# Altium PCB INT_REVA.PcbDoc
Units mm, origin at the board's own origin, x right, y up, seen from the top; angles counter-clockwise.
Board outline 95.88 x 101.01 mm, 4 copper layers (Top Layer, Layer 1, Layer 2, Bottom Layer), stack 1.586 mm thick; 2 components, 54 nets, 158 pads, 61 vias.
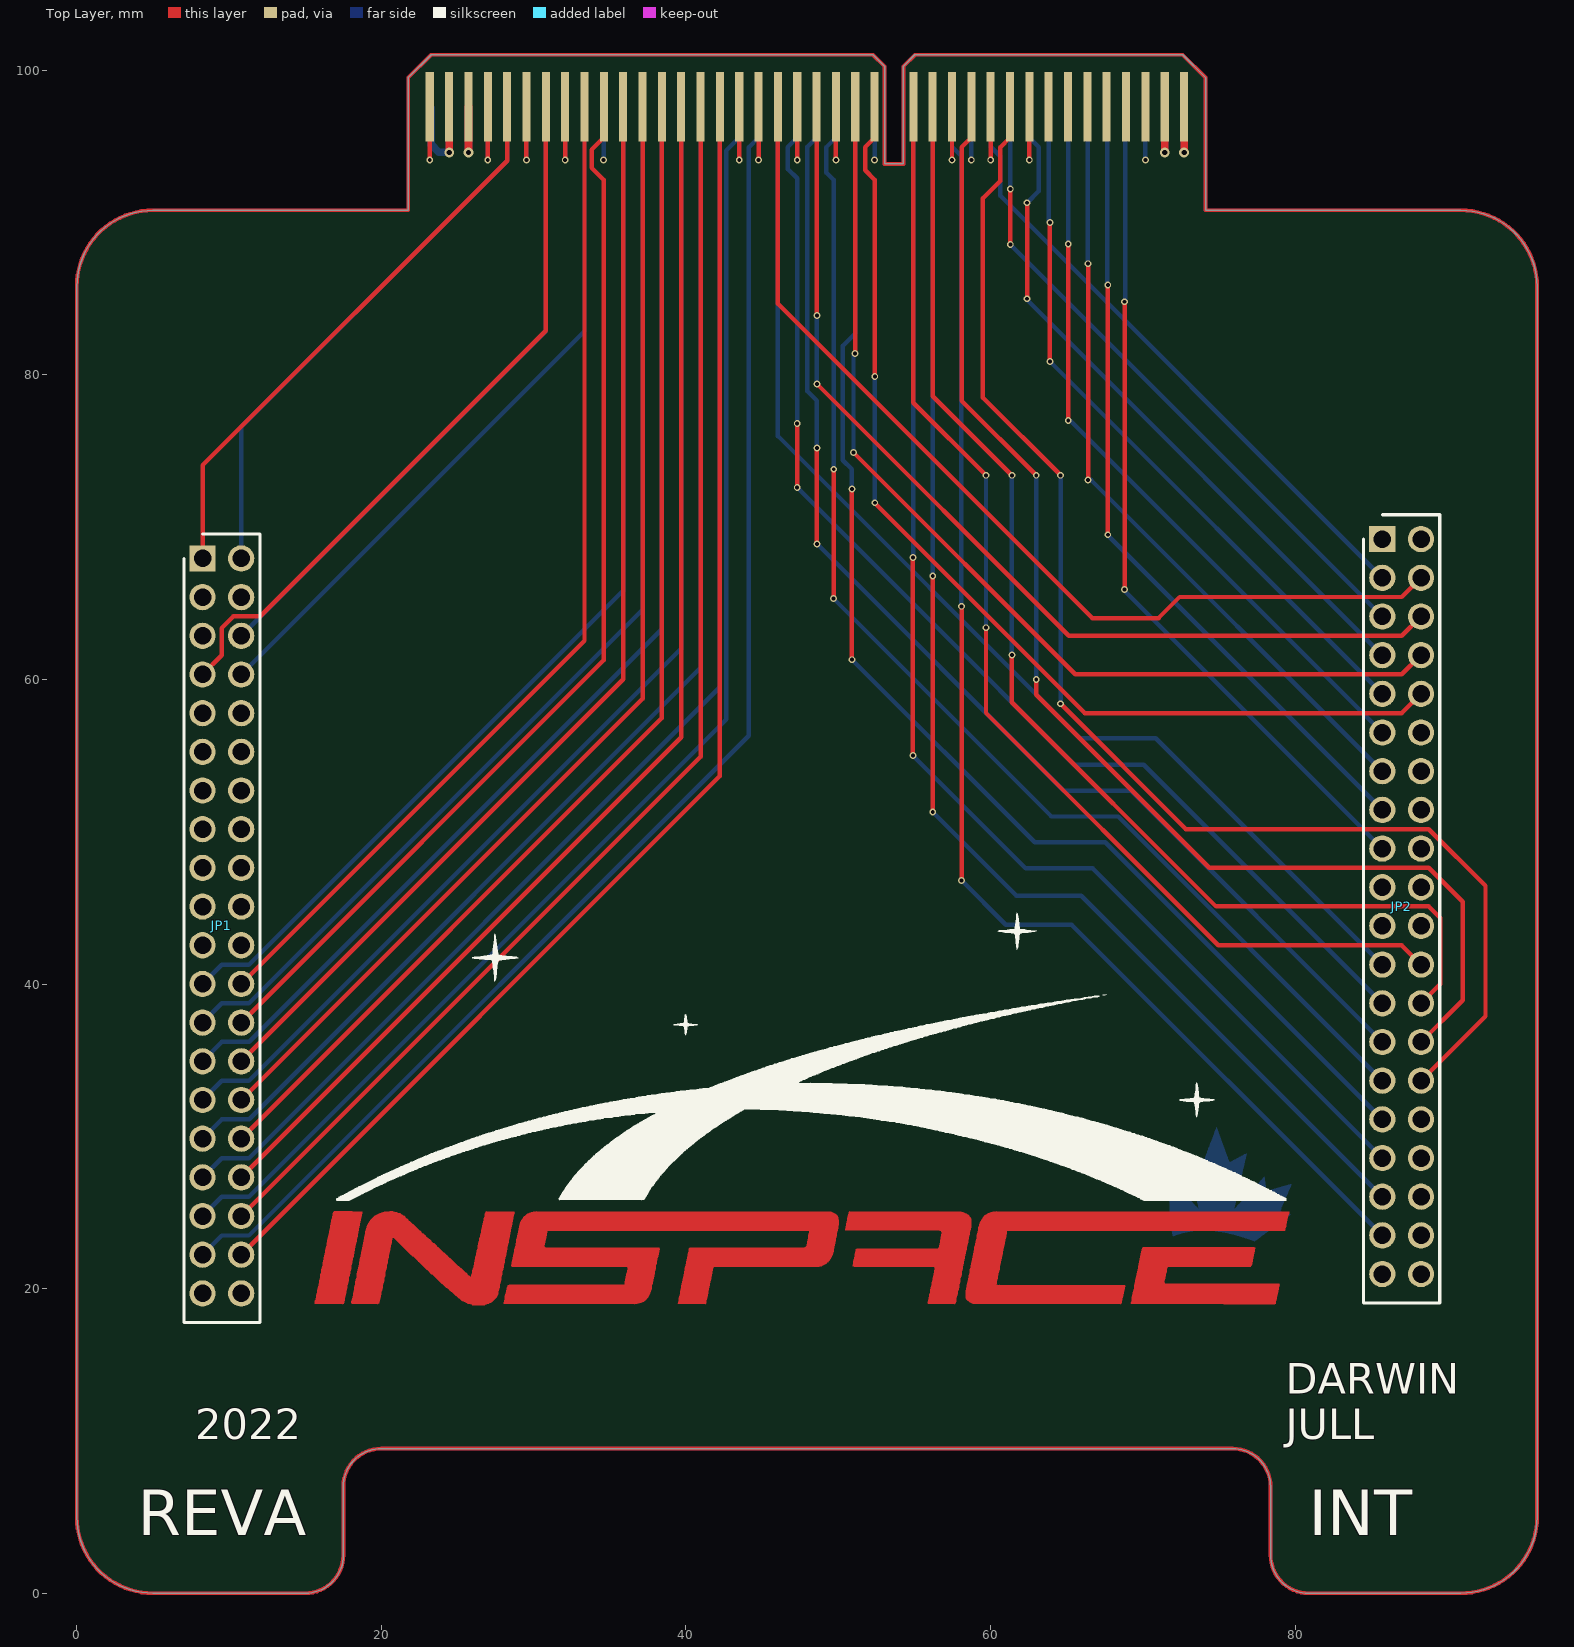
[diagram p0: Top Layer view]
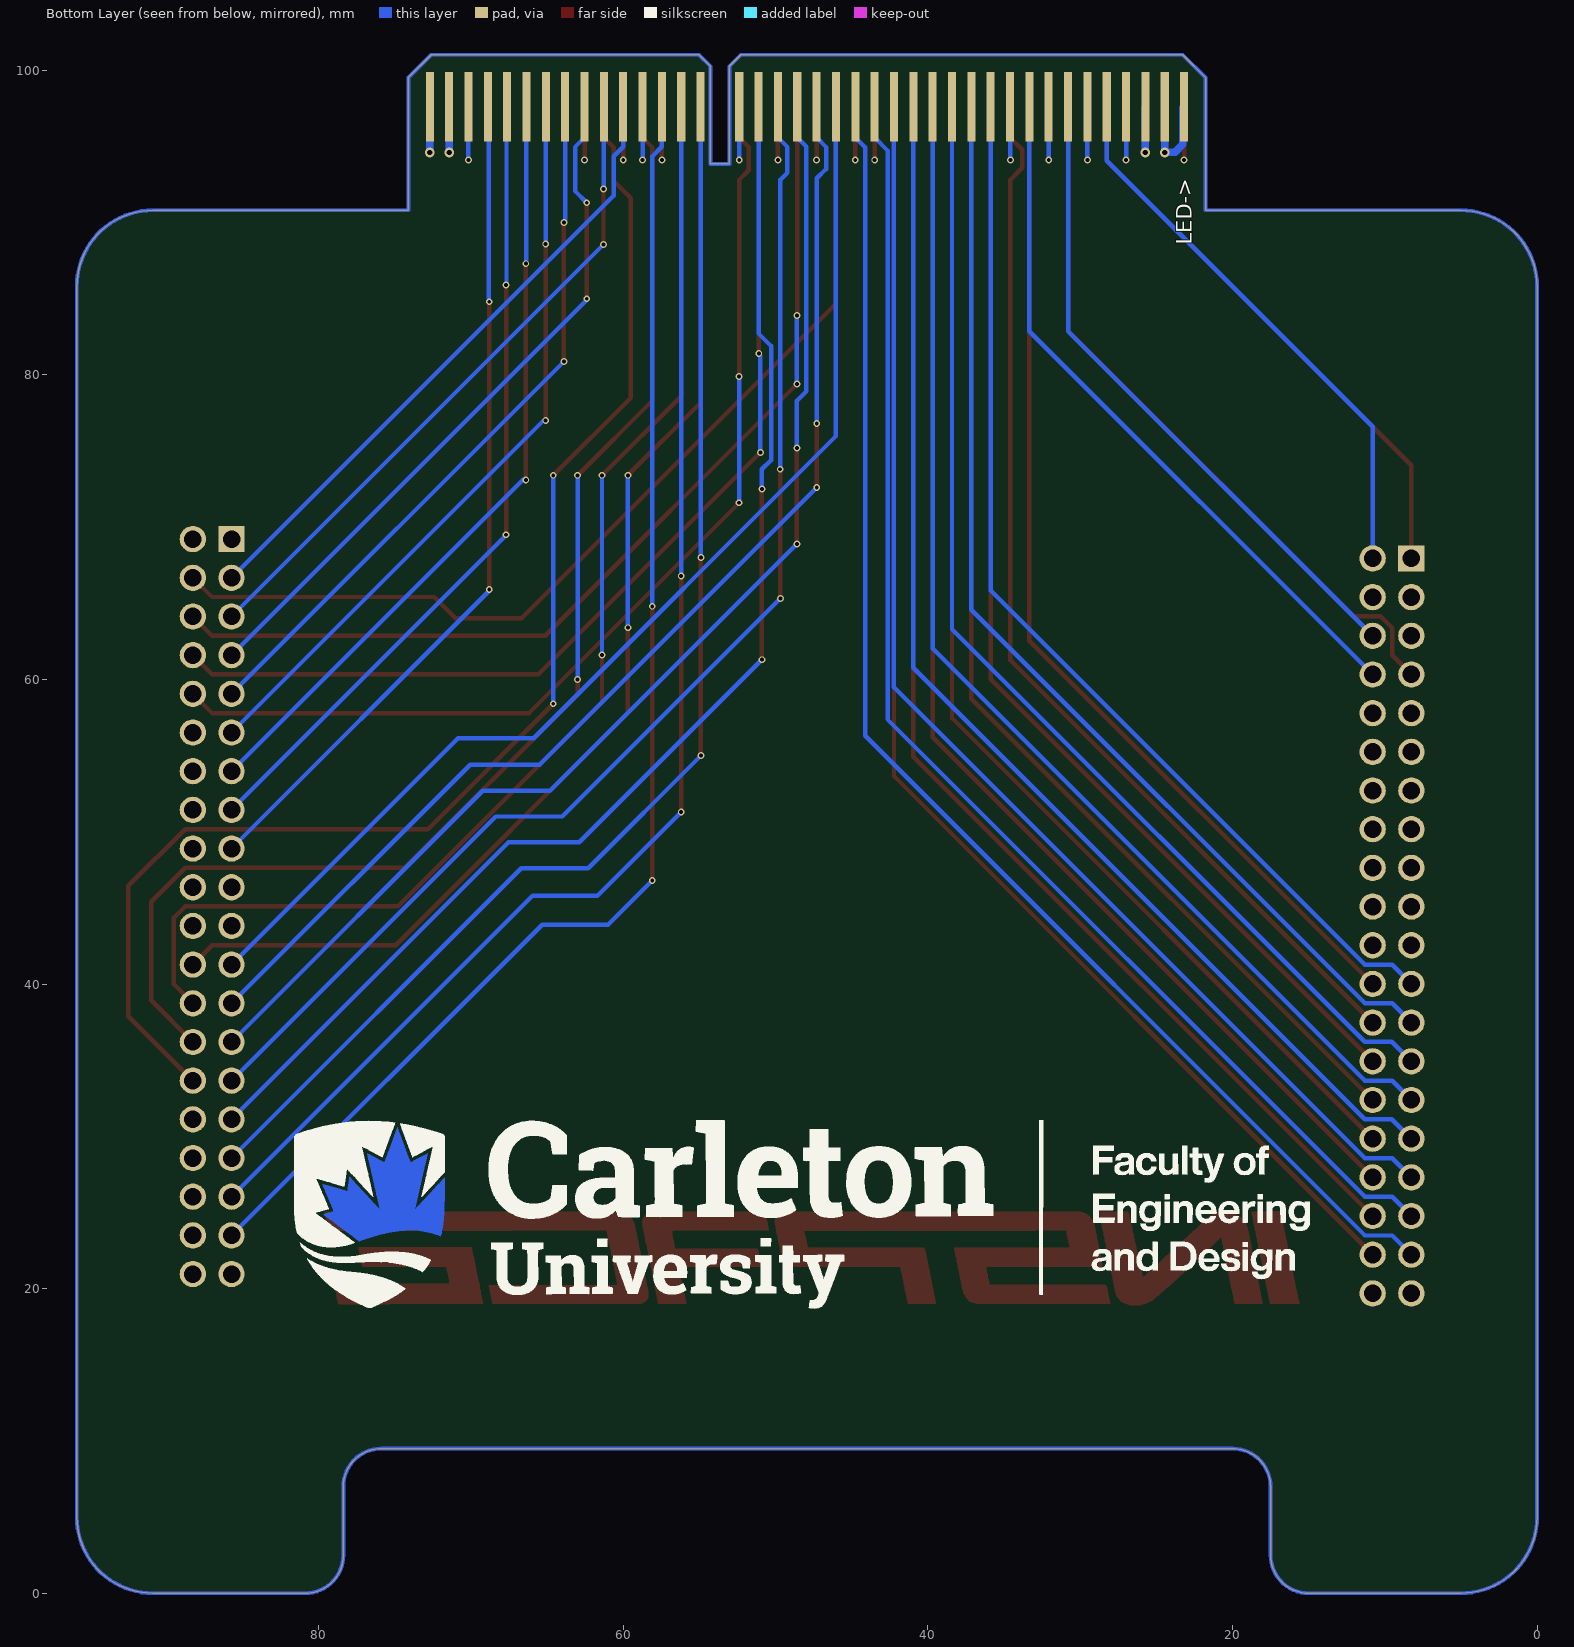
[diagram p1: Bottom Layer view, seen from below]
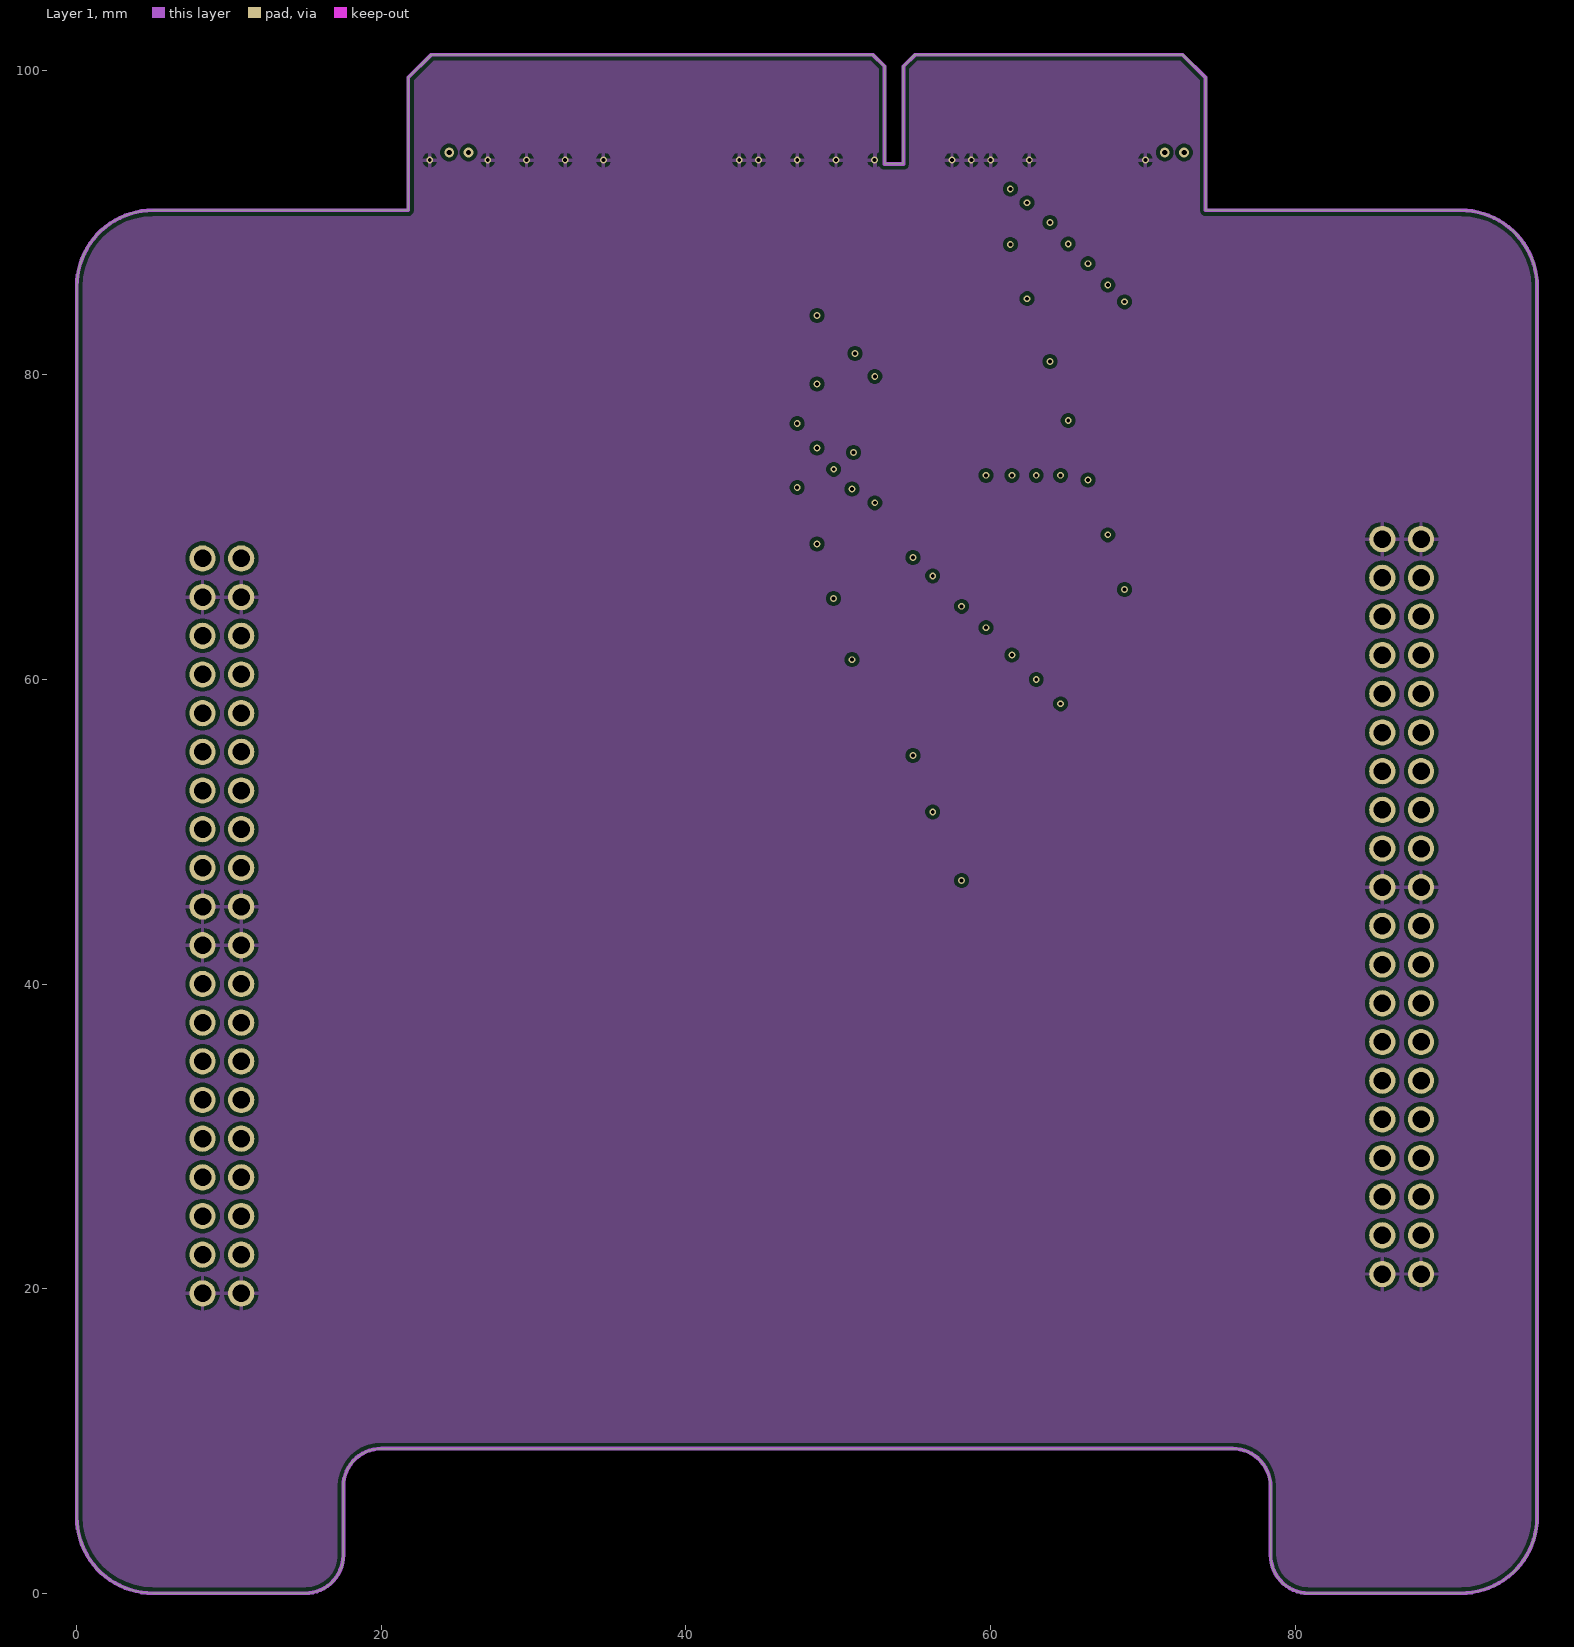
[diagram p2: Layer 1]
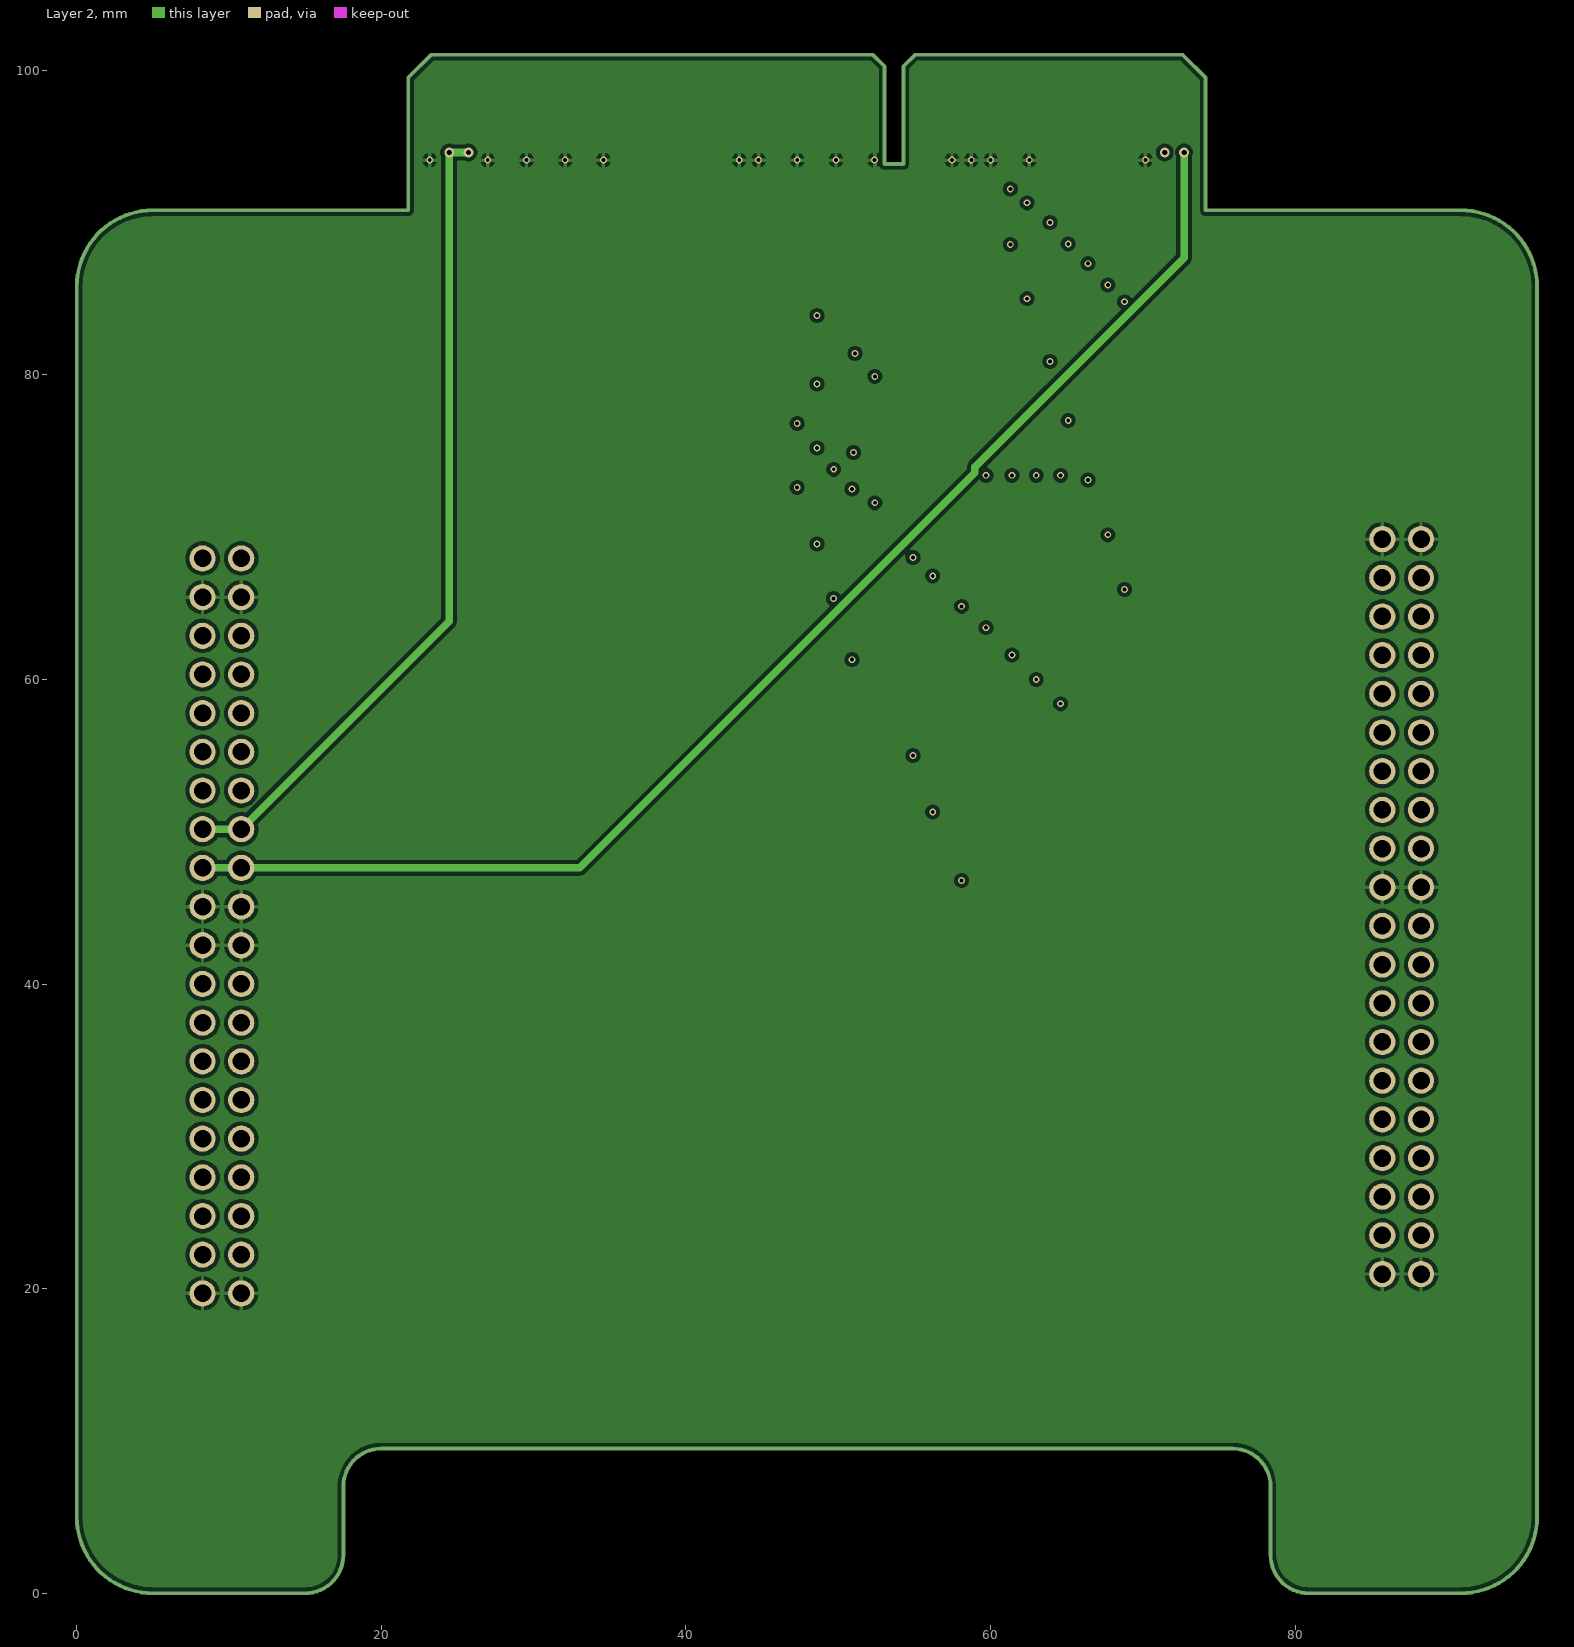
[diagram p3: Layer 2]

## Layer stack, top to bottom
Top Solder: solder mask 0.0203, Solder Resist, Dk 3.8
Top Layer: signal copper 0.035
Dielectric 2: prepreg 0.2104, PP-006, Dk 4.6
Layer 1: signal copper 0.0152
Dielectric 1: dielectric 1.065, FR-4, Dk 4.6
Layer 2: signal copper 0.0152
Dielectric 3: prepreg 0.2104, PP-006, Dk 4.6
Bottom Layer: signal copper 0.035
Bottom Solder: solder mask 0.0203, Solder Resist, Dk 3.8

## Board outline
5,0 15,0 ccw(c15,2.5) 17.5,2.5 17.5,7 cw(c20,7) 20,9.5 75.885,9.5 cw(c75.885,7) 78.385,7 78.385,2.5 ccw(c80.885,2.5) 80.885,0 90.885,0 ccw(c90.885,5) 95.885,5 95.885,85.805 ccw(c90.885,85.805) 90.885,90.805 74.117,90.805 74.117,99.517 72.617,101.015 55.027,101.015 54.277,100.265 54.277,93.855 53.037,93.855 53.037,100.265 52.287,101.015 23.267,101.015 21.767,99.517 21.768,90.805 5,90.805 ccw(c5,85.805) 0,85.805 0,5 ccw(c5,5)

## Design rules (kind name [scope] priority, off if disabled: settings)
Clearance [All] p1: gap=0.254 ignorepadtopadclearanceinfootprint=TRUE except(0: Arc-Hole Track-Hole SMDPad-Hole THPad-Hole Via-Hole Fill-Hole Poly-Hole Region-Hole Text-Hole; 0.127: Arc-Arc Arc-Track Track-Track SMDPad-SMDPad THPad-THPad)
PlaneConnect [All] p1: pad.planeconnectstyle=Relief pad.reliefexpansion=0.508 pad.reliefentries=4 pad.reliefconductorwidth=0.254 pad.reliefairgap=0.254 via.planeconnectstyle=Direct via.reliefexpansion=0.508 via.reliefentries=4 via.reliefconductorwidth=0.254 via.reliefairgap=0.254
PolygonConnect [All] p1: connectstyle=Relief reliefconductorwidth=0.254 reliefentries=4 polygonreliefangle="90 Angle" airgapwidth=0.254
RoutingVias [All] p1: holewidth=0.254 width=0.445 viastyle="Through Hole" minholewidth=0.2 minwidth=0.4 maxholewidth=6.3 maxwidth=6.4
SolderMaskExpansion [All] p1: expansion=0.102 istentingtop=FALSE
Width [All] p1: maxlimit=2.5 minlimit=0.127 preferedwidth=0.293 midlayer1_minwidth=0.254 midlayer1_prefwidth=0.254 midlayer2_minwidth=0.254 midlayer2_prefwidth=0.254 minimp=50.000000 maximp=50.000000 favimp=50.000000
29 further rules are at their usual default settings.

## Components (designator, comment, footprint, x,y, rotation, side; value= is the part's Value field where it differs from the comment)
JP1 "M20-6102045" RHDR40W66P254_2X20_5146X500X1105P 8.255,67.945 r270 top locked
JP2 "M20-6102045" RHDR40W66P254_2X20_5146X500X1105P 85.725,69.215 r270 top locked

## Footprints (in the part's own frame and the unit in brackets; to place one, negate y for a bottom-side part, rotate by r counter-clockwise, add the part's x,y. Pads: shape width x height; smd on the part's side, far side on the other; paste and mask are expansions set on the pad)
RHDR40W66P254_2X20_5146X500X1105P [mm]
  rect 1.725x1.725 / inner round 1.725 / far side rect 1.725x1.725 hole 1.15: 1(0,0)
  round 1.725 hole 1.15: 2(0,2.54) 3(2.54,0) 4(2.54,2.54) 5(5.08,0) 6(5.08,2.54) 7(7.62,0) 8(7.62,2.54) 9(10.16,0) 10(10.16,2.54) 11(12.7,0) 12(12.7,2.54) 13(15.24,0) 14(15.24,2.54) 15(17.78,0) 16(17.78,2.54) 17(20.32,0) 18(20.32,2.54) 19(22.86,0) 20(22.86,2.54) 21(25.4,0) 22(25.4,2.54) 23(27.94,0) 24(27.94,2.54) 25(30.48,0) 26(30.48,2.54) 27(33.02,0) 28(33.02,2.54) 29(35.56,0) 30(35.56,2.54) 31(38.1,0) 32(38.1,2.54) 33(40.64,0) 34(40.64,2.54) 35(43.18,0) 36(43.18,2.54) 37(45.72,0) 38(45.72,2.54) 39(48.26,0) 40(48.26,2.54)
  silkscreen extent -1.6,-1.23 50.16,3.77

## Part data
JP1 JP2: "PC / 104 Connectors PC104 STACK CONNECT 20+20 HI TEMP AU", Manufacturer_Name=Harwin, Mouser Part Number=855-M20-6102045, Datasheet Link=https://datasheet.datasheetarchive.com/originals/distributors/SFDatasheet-1/sf-00022539.pdf, Geometry.Height=11.05mm, Manufacturer_Part_Number=M20-6102045, Mouser Price/Stock=https://www.mouser.co.uk/ProductDetail/Harwin/M20-6102045?qs=pYcASEcTDE4FwHXnSlfG3Q%3D%3D

## Free pads (board coordinates)
  rect 0.53x4.572 smd: 1(72.707,97.6) 3(71.437,97.6) 5(70.167,97.6) 7(68.897,97.6) 9(67.627,97.6) 11(66.357,97.6) 13(65.087,97.6) 15(63.817,97.6) 17(62.547,97.6) 19(61.277,97.6) 21(60.007,97.6) 23(58.737,97.6) 25(57.467,97.6) 27(56.197,97.6) 29(54.927,97.6) 31(52.387,97.6) 33(51.117,97.6) 35(49.847,97.6) 37(48.577,97.6) 39(47.307,97.6) 41(46.037,97.6) 43(44.767,97.6) 45(43.497,97.6) 47(42.227,97.6) 49(40.957,97.6) 51(39.687,97.6) 53(38.417,97.6) 55(37.147,97.6) 57(35.877,97.6) 59(34.607,97.6) 61(33.337,97.6) 63(32.067,97.6) 65(30.797,97.6) 67(29.527,97.6) 69(28.257,97.6) 71(26.987,97.6) 73(25.717,97.6) 75(24.447,97.6) 77(23.177,97.6)
  rect 0.53x4.572 smd far side: 2(72.707,97.6) 4(71.437,97.6) 6(70.167,97.6) 8(68.897,97.6) 10(67.627,97.6) 12(66.357,97.6) 14(65.087,97.6) 16(63.817,97.6) 18(62.547,97.6) 20(61.277,97.6) 22(60.007,97.6) 24(58.737,97.6) 26(57.467,97.6) 28(56.197,97.6) 30(54.927,97.6) 32(52.387,97.6) 34(51.117,97.6) 36(49.847,97.6) 38(48.577,97.6) 40(47.307,97.6) 42(46.037,97.6) 44(44.767,97.6) 46(43.497,97.6) 48(42.227,97.6) 50(40.957,97.6) 52(39.687,97.6) 54(38.417,97.6) 56(37.147,97.6) 58(35.877,97.6) 60(34.607,97.6) 62(33.337,97.6) 64(32.067,97.6) 66(30.797,97.6) 68(29.527,97.6) 70(28.257,97.6) 72(26.987,97.6) 74(25.717,97.6) 76(24.447,97.6) 78(23.177,97.6)

## Via types
v1: diameter 0.444, hole 0.254, Top Layer to Bottom Layer, 57 vias
v2: diameter 0.635, hole 0.356, Top Layer to Bottom Layer, 4 vias

## Nets (pads, with @x,y where several pads share a name; then routed paths per layer and width w, separated by ;. In a path a pad name is that pad's centre, name@x,y a point inside that pad or via, vN(x,y) a via of type N, cw(c..) or ccw(c..) an arc to the next point about the centre after c; other vN are vias at no path point)
+3.3V: JP1.15 JP1.16 pad.3 pad.4 pad.73 pad.74 pad.75 pad.76 pad.78 | length 75.8
  Top Layer w0.5: v2(24.447,94.6) pad.75 ; v2(25.717,94.6) pad.73 ; v2(71.437,94.6) pad.3
  Layer 2 w0.5: JP1.15 JP1.16 24.447,63.817 v2(24.447,94.6) v2(25.717,94.6)
  Bottom Layer w0.5: pad.78 23.257,97.52 23.257,95.143 23.774,94.626 24.421,94.626 v2(24.447,94.6) pad.76 ; v2(25.717,94.6) pad.74 ; v2(71.437,94.6) pad.4
+5V: JP1.17 JP1.18 pad.1 pad.2 | length 94.2
  Top Layer w0.5: v2(72.707,94.6) pad.1
  Layer 2 w0.5: JP1.17 JP1.18 33.025,47.625 58.974,73.574 58.974,73.947 72.707,87.68 v2(72.707,94.6)
  Bottom Layer w0.5: v2(72.707,94.6) pad.2
A0: JP2.3 pad.22 | length 41.6
  Bottom Layer w0.293: pad.22 60.007,94.98 60.63,94.358 60.63,91.77 JP2.3
A1: JP2.5 pad.20 | length 43.6
  Top Layer w0.293: v1(61.3,88.56) v1(61.3,92.2)
  Bottom Layer w0.293: pad.20 61.288,97.589 61.288,92.212 v1(61.3,92.2) ; v1(61.3,88.56) JP2.5
A2: JP2.7 pad.18 | length 46.2
  Top Layer w0.293: v1(62.4,85) v1(62.4,91.3)
  Bottom Layer w0.293: v1(62.4,85) 62.4,84.92 JP2.7 ; v1(62.4,91.3) 63.17,92.07 63.17,94.957 62.547,95.579 pad.18
A3: JP2.9 pad.16 | length 47.6
  Top Layer w0.293: v1(63.9,80.88) v1(63.9,90)
  Bottom Layer w0.293: pad.16 63.817,90.124 63.9,90.041 v1(63.9,90) ; v1(63.9,80.88) JP2.9
A4: JP2.11 pad.14 | length 49.7
  Top Layer w0.293: v1(65.1,77) v1(65.1,88.6)
  Bottom Layer w0.293: pad.14 65.093,97.594 65.093,88.607 v1(65.1,88.6) ; v1(65.1,77) 65.24,77 JP2.11
A5: JP2.13 pad.12 | length 51.8
  Top Layer w0.293: v1(66.4,73.1) v1(66.4,87.3)
  Bottom Layer w0.293: pad.12 66.378,97.579 66.378,87.322 v1(66.4,87.3) ; v1(66.4,73.1) 66.6,73.1 JP2.13
A6: JP2.15 pad.10 | length 53.7
  Top Layer w0.293: v1(67.7,69.5) v1(67.7,85.9)
  Bottom Layer w0.293: pad.10 67.671,97.556 67.671,85.929 v1(67.7,85.9) ; v1(67.7,69.5) 67.7,69.46 JP2.15
A7: JP2.17 pad.8 | length 55.8
  Top Layer w0.293: v1(68.8,65.9) v1(68.8,84.8)
  Bottom Layer w0.293: v1(68.8,65.9) 68.8,65.82 JP2.17 ; v1(68.8,84.8) 68.829,84.829 68.829,97.532 pad.8
A12: JP2.10 pad.31 | length 68.6
  Top Layer w0.293: pad.31 52.387,95.579 51.764,94.957 51.764,93.436 52.4,92.8 v1(52.4,79.9) ; v1(52.4,71.6) 52.4,71.58 66.188,57.792 87.002,57.792 JP2.10
  Bottom Layer w0.293: v1(52.4,71.6) v1(52.4,79.9)
A13: JP2.8 pad.33 | length 66.6
  Top Layer w0.293: v1(51,74.9) 65.568,60.332 87.002,60.332 JP2.8 ; v1(51.1,81.4) 51.117,81.417 pad.33
  Bottom Layer w0.293: v1(51,74.9) 51,81.259 51.1,81.359 v1(51.1,81.4)
DAC0: JP2.4 pad.41 | length 64.8
  Top Layer w0.293: pad.41 46.037,84.664 66.668,64.032 71.032,64.032 72.412,65.412 87.002,65.412 JP2.4
DAC1: JP2.6 pad.37 | length 65.2
  Top Layer w0.293: pad.37 48.588,97.588 48.588,83.912 v1(48.6,83.9) ; v1(48.6,79.4) 65.128,62.872 87.002,62.872 JP2.6
  Bottom Layer w0.293: v1(48.6,79.4) v1(48.6,83.9)
GND: JP1.3 JP1.4 JP1.19 JP1.20 JP1.21 JP1.22 JP1.39 JP1.40 JP2.1 JP2.2 JP2.19 JP2.20 JP2.39 JP2.40 pad.6 pad.17 pad.21 pad.24 pad.25 pad.32 pad.35 pad.39 pad.43 pad.45 pad.60 pad.63 pad.64 pad.67 pad.68 pad.71 pad.72 pad.77 | length 63
  Top Layer w0.293: v1(23.177,94.1) pad.77 ; v1(26.987,94.1) pad.71 ; v1(29.527,94.1) pad.67 ; v1(32.067,94.1) pad.63 ; v1(43.497,94.1) pad.45 ; v1(44.767,94.1) pad.43 ; v1(47.307,94.1) pad.39 ; v1(49.847,94.1) pad.35 ; v1(57.467,94.1) pad.25 ; v1(60.007,94.1) pad.21 ; v1(62.547,94.1) pad.17
  Bottom Layer w0.293: v1(26.987,94.1) pad.72 ; v1(29.527,94.1) pad.68 ; v1(32.067,94.1) pad.64 ; v1(34.578,94.1) 34.592,94.115 34.592,97.585 pad.60 ; v1(52.387,94.1) pad.32 ; v1(58.737,94.1) pad.24 ; v1(70.167,94.1) pad.6
GPIO0: JP1.23 pad.58 | length 70.1
  Bottom Layer w0.293: JP1.23 9.518,41.268 11.304,41.268 35.877,65.841 pad.58
GPIO1: JP1.25 pad.56 | length 73.1
  Bottom Layer w0.293: JP1.25 9.518,38.728 11.304,38.728 37.147,64.571 pad.56
GPIO2: JP1.27 pad.54 | length 76.2
  Bottom Layer w0.293: JP1.27 9.532,36.202 11.318,36.202 38.417,63.301 pad.54
GPIO3: JP1.29 pad.52 | length 79.3
  Bottom Layer w0.293: JP1.29 9.518,33.648 11.304,33.648 39.687,62.031 pad.52
GPIO4: JP1.31 pad.50 | length 82.3
  Bottom Layer w0.293: JP1.31 9.532,31.122 11.318,31.122 40.957,60.761 pad.50
GPIO5: JP1.33 pad.48 | length 85.4
  Bottom Layer w0.293: JP1.33 9.518,28.568 11.304,28.568 42.227,59.491 pad.48
GPIO6: JP1.35 pad.46 | length 88.5
  Bottom Layer w0.293: JP1.35 9.518,26.028 11.304,26.028 42.647,57.371 42.647,94.729 43.497,95.579 pad.46
GPIO7: JP1.37 pad.44 | length 91.5
  Bottom Layer w0.293: JP1.37 9.518,23.488 11.304,23.488 44.12,56.303 44.12,94.932 44.767,95.579 pad.44
GPIO8: JP2.23 pad.42 | length 75.7
  Bottom Layer w0.293: pad.42 46.037,75.983 65.874,56.146 70.854,56.146 JP2.23
GPIO9: JP2.25 pad.40 | length 78
  Top Layer w0.293: v1(47.3,72.6) v1(47.3,76.8)
  Bottom Layer w0.293: v1(47.3,72.6) 55.702,64.198 65.5,54.4 70.06,54.4 JP2.25 ; v1(47.3,76.8) 47.3,92.9 46.684,93.516 46.684,94.957 47.307,95.579 pad.40
GPIO10: JP2.27 pad.38 | length 79.9
  Top Layer w0.293: v1(48.6,68.9) v1(48.6,75.2)
  Bottom Layer w0.293: pad.38 48.577,95.579 47.977,94.98 47.977,78.923 48.6,78.3 v1(48.6,75.2) ; v1(48.6,68.9) 64.815,52.684 69.236,52.684 JP2.27
GPIO11: JP2.29 pad.36 | length 81.9
  Top Layer w0.293: v1(49.687,65.313) 49.693,65.32 49.693,73.793 v1(49.7,73.8)
  Bottom Layer w0.293: v1(49.687,65.313) 64,51 68.38,51 JP2.29 ; v1(49.7,73.8) 49.7,92.8 49.224,93.276 49.224,94.957 49.847,95.579 pad.36
GPIO12: JP2.31 pad.34 | length 84.2
  Top Layer w0.293: v1(50.9,61.3) v1(50.9,72.5)
  Bottom Layer w0.293: v1(50.9,61.3) 62.9,49.3 67.54,49.3 JP2.31 ; v1(50.9,72.5) 50.9,73.8 50.3,74.4 50.3,81.9 51.117,82.717 pad.34
GPIO13: JP2.33 pad.30 | length 84.4
  Top Layer w0.293: v1(54.9,55) v1(54.9,68)
  Bottom Layer w0.293: v1(54.9,55) 62.3,47.6 66.7,47.6 JP2.33 ; v1(54.9,68) 54.927,68.027 pad.30
GPIO14: JP2.35 pad.28 | length 86.3
  Top Layer w0.293: v1(56.2,51.3) v1(56.2,66.8)
  Bottom Layer w0.293: pad.28 56.197,66.803 v1(56.2,66.8) ; v1(56.2,51.3) 61.7,45.8 65.96,45.8 JP2.35
GPIO15: JP2.37 pad.26 | length 88.3
  Top Layer w0.293: v1(58.1,46.8) v1(58.1,64.8)
  Bottom Layer w0.293: pad.26 57.467,94.98 58.09,94.358 58.09,64.811 v1(58.1,64.8) ; v1(58.1,46.8) 61,43.9 65.32,43.9 JP2.37
GPIO22: JP2.26 pad.27 | length 81.4
  Top Layer w0.293: pad.27 56.197,78.603 v1(61.4,73.4) ; v1(61.4,61.6) 61.4,58.5 74.808,45.092 88.774,45.092 89.528,44.338 89.528,39.998 JP2.26
  Bottom Layer w0.293: v1(61.4,61.6) v1(61.4,73.4)
GPIO23: JP2.24 pad.29 | length 77.2
  Top Layer w0.293: pad.29 54.927,78.173 v1(59.7,73.4) ; v1(59.7,63.4) 59.7,57.8 74.948,42.552 86.988,42.552 JP2.24
  Bottom Layer w0.293: v1(59.7,63.4) v1(59.7,73.4)
I2C0_SCL: JP1.1 pad.69 | length 37.9
  Top Layer w0.293: JP1.1 8.255,74.055 28.257,94.057 pad.69
I2C0_SDA: JP1.7 pad.65 | length 47.6
  Top Layer w0.293: JP1.7 9.518,61.588 9.518,63.374 10.286,64.142 12.042,64.142 30.797,82.897 pad.65
I2C1_SCL: JP2.28 pad.23 | length 84.9
  Top Layer w0.293: pad.23 58.737,95.579 58.114,94.957 58.114,78.286 v1(63,73.4) ; v1(63,60) 63,59 74.368,47.632 88.774,47.632 91,45.406 91,38.93 JP2.28
  Bottom Layer w0.293: v1(63,60) v1(63,73.4)
I2C1_SDA: JP2.30 pad.19 | length 89.4
  Top Layer w0.293: pad.19 61.277,95.579 60.63,94.932 60.63,92.73 59.5,91.6 59.5,78.5 v1(64.6,73.4) ; v1(64.6,58.4) 72.828,50.172 88.774,50.172 92.5,46.446 92.5,37.89 JP2.30
  Bottom Layer w0.293: v1(64.6,58.4) v1(64.6,73.4)
PORT0: pad.15
PORT1: pad.13
PORT2: pad.11
PORT3: pad.9
PORT4: pad.7
PORT5: pad.5
SPI_MISO: JP1.8 pad.62 | length 46.6
  Bottom Layer w0.293: JP1.8 33.337,82.867 pad.62
SPI_MOSI: JP1.6 pad.66 | length 43
  Bottom Layer w0.293: JP1.6 30.797,82.867 pad.66
SPI_SCK: JP1.2 pad.70 | length 36.9
  Bottom Layer w0.293: JP1.2 10.795,76.595 28.257,94.057 pad.70
UART0_RX: JP1.24 pad.61 | length 66.9
  Top Layer w0.293: JP1.24 33.337,62.547 pad.61
UART0_TX: JP1.26 pad.59 | length 70.7
  Top Layer w0.293: JP1.26 34.6,61.27 34.6,92.8 33.8,93.6 33.8,94.773 34.607,95.579 pad.59
UART1_RX: JP1.28 pad.57 | length 73.1
  Top Layer w0.293: JP1.28 35.877,60.007 pad.57
UART1_TX: JP1.30 pad.55 | length 76.1
  Top Layer w0.293: JP1.30 37.147,58.737 pad.55
UART2_RX: JP1.32 pad.53 | length 79.2
  Top Layer w0.293: JP1.32 38.417,57.467 pad.53
UART2_TX: JP1.34 pad.51 | length 82.3
  Top Layer w0.293: JP1.34 39.687,56.197 pad.51
UART3_RX: JP1.36 pad.49 | length 85.3
  Top Layer w0.293: JP1.36 40.957,54.927 pad.49
UART3_TX: JP1.38 pad.47 | length 88.4
  Top Layer w0.293: JP1.38 42.227,53.657 pad.47
pads on no net: JP1.5 JP1.9 JP1.10 JP1.11 JP1.12 JP1.13 JP1.14 JP2.12 JP2.14 JP2.16 JP2.18 JP2.21 JP2.22 JP2.32 JP2.34 JP2.36 JP2.38

## Polygon pours and split planes (outlines as drawn)
GND on Layer 2 "NONET_L-01_P-001" (solid, remove dead copper, pour order 0): 0,0 96.1,0 96.1,101.9 96,102 0,102
GND on Layer 1 "NONET_L-01_P-001" (solid, remove dead copper, pour order 1): 0,0 96,0 96.1,0.1 96.1,104.6 0.2,104.6 0,104.8

## Other copper
Top Layer:
  region: 75.31,18.985 69.229,19.003 69.201,19.05 69.238,19.143 69.256,19.217 69.284,19.431 69.312,19.533 69.349,19.682 69.368,19.868 69.387,19.924 69.424,20.054 69.442,20.184 69.47,20.343 69.498,20.445 69.517,20.519 69.563,20.807 69.591,20.91 69.61,20.984 69.656,21.254 69.684,21.356 69.703,21.431 69.731,21.644 69.749,21.719 69.777,21.821 69.796,21.896 69.824,22.109 69.87,22.268 69.917,22.556 69.954,22.649 69.991,22.705 70.084,22.723 70.14,22.705 77.329,22.714 77.366,22.695 77.375,22.63 77.356,22.537 77.338,22.463 77.31,22.361 77.291,22.175 77.217,21.877 77.17,21.589 77.133,21.496 77.096,21.44 77.022,21.421 76.938,21.431 71.795,21.421 71.739,21.44 71.684,21.421 71.6,21.375 71.581,21.245 71.553,21.086 71.507,20.928 71.46,20.659 71.442,20.584 71.414,20.482 71.433,20.333 78.965,20.315 78.984,20.24 78.947,20.147 78.919,20.026 78.882,19.785 78.826,19.561 78.807,19.413 78.789,19.32 78.77,19.245 78.742,19.143 78.714,19.003 78.658,18.985 75.329,18.985
  region: 67.331,23.802 61.101,23.783 61.073,23.755 61.054,23.569 61.036,23.495 61.017,23.383 60.998,23.328 60.961,23.179 60.943,22.993 60.924,22.937 60.887,22.807 60.84,22.537 60.803,22.388 60.784,22.277 60.747,22.072 60.719,21.97 60.701,21.896 60.673,21.682 60.645,21.579 60.608,21.431 60.589,21.245 60.571,21.189 60.533,21.059 60.515,20.928 60.487,20.77 60.459,20.668 60.44,20.594 60.422,20.463 60.394,20.324 60.385,20.296 60.431,20.25 60.524,20.231 60.58,20.25 68.801,20.231 68.829,20.203 68.801,20.008 68.764,19.859 68.736,19.757 68.708,19.543 68.68,19.44 68.643,19.292 68.615,19.096 68.578,19.003 68.503,18.985 58.832,19.003 58.627,19.115 58.469,19.236 58.45,19.273 58.413,19.31 58.376,19.403 58.357,19.701 58.376,19.831 58.394,20.017 58.432,20.11 58.45,20.24 58.469,20.315 58.487,20.482 58.525,20.575 58.562,20.835 58.59,20.938 58.627,21.086 58.646,21.235 58.664,21.328 58.683,21.403 58.711,21.505 58.729,21.635 58.757,21.793 58.785,21.896 58.804,21.97 58.822,22.1 58.85,22.258 58.897,22.416 58.925,22.63 58.943,22.705 58.971,22.807 58.99,22.881 59.018,23.095 59.045,23.197 59.083,23.346 59.101,23.532 59.12,23.588 59.157,23.718 59.176,23.848 59.204,24.007 59.25,24.165 59.287,24.332 59.343,24.425 59.417,24.555 59.51,24.685 59.548,24.723 59.566,24.76 59.631,24.806 59.687,24.862 59.78,24.918 60.022,25.03 60.152,25.048 60.394,25.067 79.616,25.057 79.607,24.899 79.57,24.881 79.542,24.778 79.523,24.648 79.495,24.509 79.449,24.351 79.421,24.174 79.402,24.1 79.356,23.941 79.337,23.83 79.309,23.802 67.35,23.802
  region: 51.038,21.421 50.955,21.468 50.973,21.747 50.992,21.803 51.029,21.933 51.048,22.007 51.066,22.193 51.085,22.249 51.122,22.379 51.141,22.509 51.159,22.584 51.206,22.63 56.581,22.649 56.609,22.677 56.665,22.9 56.683,23.086 56.702,23.16 56.739,23.29 56.776,23.551 56.795,23.625 56.776,23.755 56.748,23.783 56.674,23.802 50.462,23.821 50.453,23.904 50.49,23.997 50.527,24.258 50.555,24.379 50.583,24.481 50.601,24.555 50.629,24.769 50.648,24.844 50.676,24.946 50.694,25.02 50.741,25.067 58.069,25.048 58.125,25.03 58.199,25.011 58.329,24.955 58.422,24.899 58.553,24.806 58.636,24.723 58.655,24.685 58.692,24.648 58.729,24.555 58.748,24.313 58.72,24.025 58.664,23.802 58.646,23.709 58.627,23.56 58.608,23.486 58.58,23.383 58.562,23.309 58.543,23.123 58.525,23.049 58.487,22.919 58.469,22.844 58.441,22.649 58.422,22.574 58.394,22.472 58.376,22.342 58.348,22.184 58.32,22.082 58.301,22.007 58.283,21.877 58.255,21.737 58.236,21.663 58.208,21.561 58.19,21.375 58.171,21.3 58.134,21.17 58.115,21.096 58.097,20.91 58.06,20.78 58.022,20.631 57.995,20.436 57.976,20.361 57.948,20.259 57.929,20.129 57.902,19.971 57.874,19.868 57.855,19.794 57.837,19.664 57.809,19.524 57.79,19.45 57.762,19.347 57.744,19.161 57.725,19.087 57.678,19.003 57.604,18.985 55.893,19.003 55.865,19.05 55.884,19.106 55.911,19.227 55.939,19.329 55.977,19.589 56.032,19.775 56.051,19.905 56.079,20.064 56.107,20.166 56.125,20.24 56.144,20.37 56.172,20.51 56.19,20.584 56.218,20.687 56.265,20.956 56.302,21.105 56.33,21.356 56.311,21.412 56.228,21.44 56.153,21.421 51.104,21.431 51.057,21.421
  region: 204 vertices and 0 holes, not listed, extent 28.022,18.985 50.043,25.067
  region: 292 vertices and 0 holes, not listed, extent 18.016,18.892 28.747,25.076
  region: 18.081,25.067 18.732,25.048 18.741,24.909 18.722,24.853 18.694,24.751 18.676,24.676 18.62,24.341 18.592,24.239 18.573,24.165 18.527,23.895 18.499,23.793 18.481,23.718 18.453,23.504 18.434,23.43 18.406,23.328 18.388,23.253 18.369,23.067 18.35,23.012 18.313,22.881 18.295,22.751 18.267,22.593 18.239,22.491 18.22,22.416 18.174,22.128 18.146,22.026 18.127,21.951 18.081,21.682 18.053,21.579 18.034,21.505 18.006,21.291 17.988,21.217 17.96,21.114 17.941,21.04 17.923,20.854 17.904,20.798 17.867,20.668 17.848,20.538 17.82,20.38 17.792,20.277 17.774,20.203 17.755,20.073 17.727,19.915 17.699,19.812 17.681,19.738 17.634,19.468 17.606,19.366 17.588,19.292 17.56,19.078 17.532,19.013 17.448,18.985 15.616,18.994 15.626,19.189 15.663,19.208 15.691,19.31 15.709,19.496 15.728,19.571 15.756,19.673 15.774,19.747 15.793,19.859 15.83,20.064 15.849,20.138 15.877,20.24 15.905,20.454 15.923,20.529 15.951,20.631 15.97,20.705 15.998,20.919 16.044,21.077 16.063,21.207 16.09,21.365 16.109,21.44 16.137,21.542 16.156,21.672 16.183,21.83 16.211,21.933 16.23,22.007 16.276,22.277 16.304,22.379 16.323,22.454 16.351,22.667 16.369,22.742 16.397,22.844 16.416,22.919 16.444,23.132 16.49,23.29 16.509,23.421 16.537,23.579 16.565,23.681 16.583,23.755 16.602,23.886 16.63,24.044 16.658,24.146 16.676,24.22 16.723,24.49 16.751,24.592 16.769,24.667 16.797,24.881 16.816,24.955 16.844,25.02 16.89,25.067 18.062,25.067
Bottom Layer:
  region: 824 vertices and 0 holes, not listed, extent 71.726,23.111 79.749,30.579
Multi-Layer:
  the board outline again, w0.254

## Silkscreen, mask and mechanical layers (free items; w line width, h text height)
Top Overlay:
  drawing of 6 lines, arcs and shapes, not listed
  text "DARWIN" at 79.385,13.1 h2
  text "2022" at 7.769,10.1 h2
  text "JULL" at 79.385,10.1 h2
  text "REVA" at 3.996,3.808 h3
  text "INT" at 80.893,3.808 h3
Bottom Overlay:
  drawing of 57 lines, arcs and shapes, not listed
  text "LED->" at 22.677,88.554 h1 r270